# Altium PCB ECB02S2-Kit-V1.0.PcbDoc
Units mil, origin at the board's own origin, x right, y up, seen from the top; angles counter-clockwise.
Board outline 1299.21 x 1141.73 mil, 2 copper layers (Top Layer, Bottom Layer); 12 components, 15 nets, 76 pads, 62 vias.
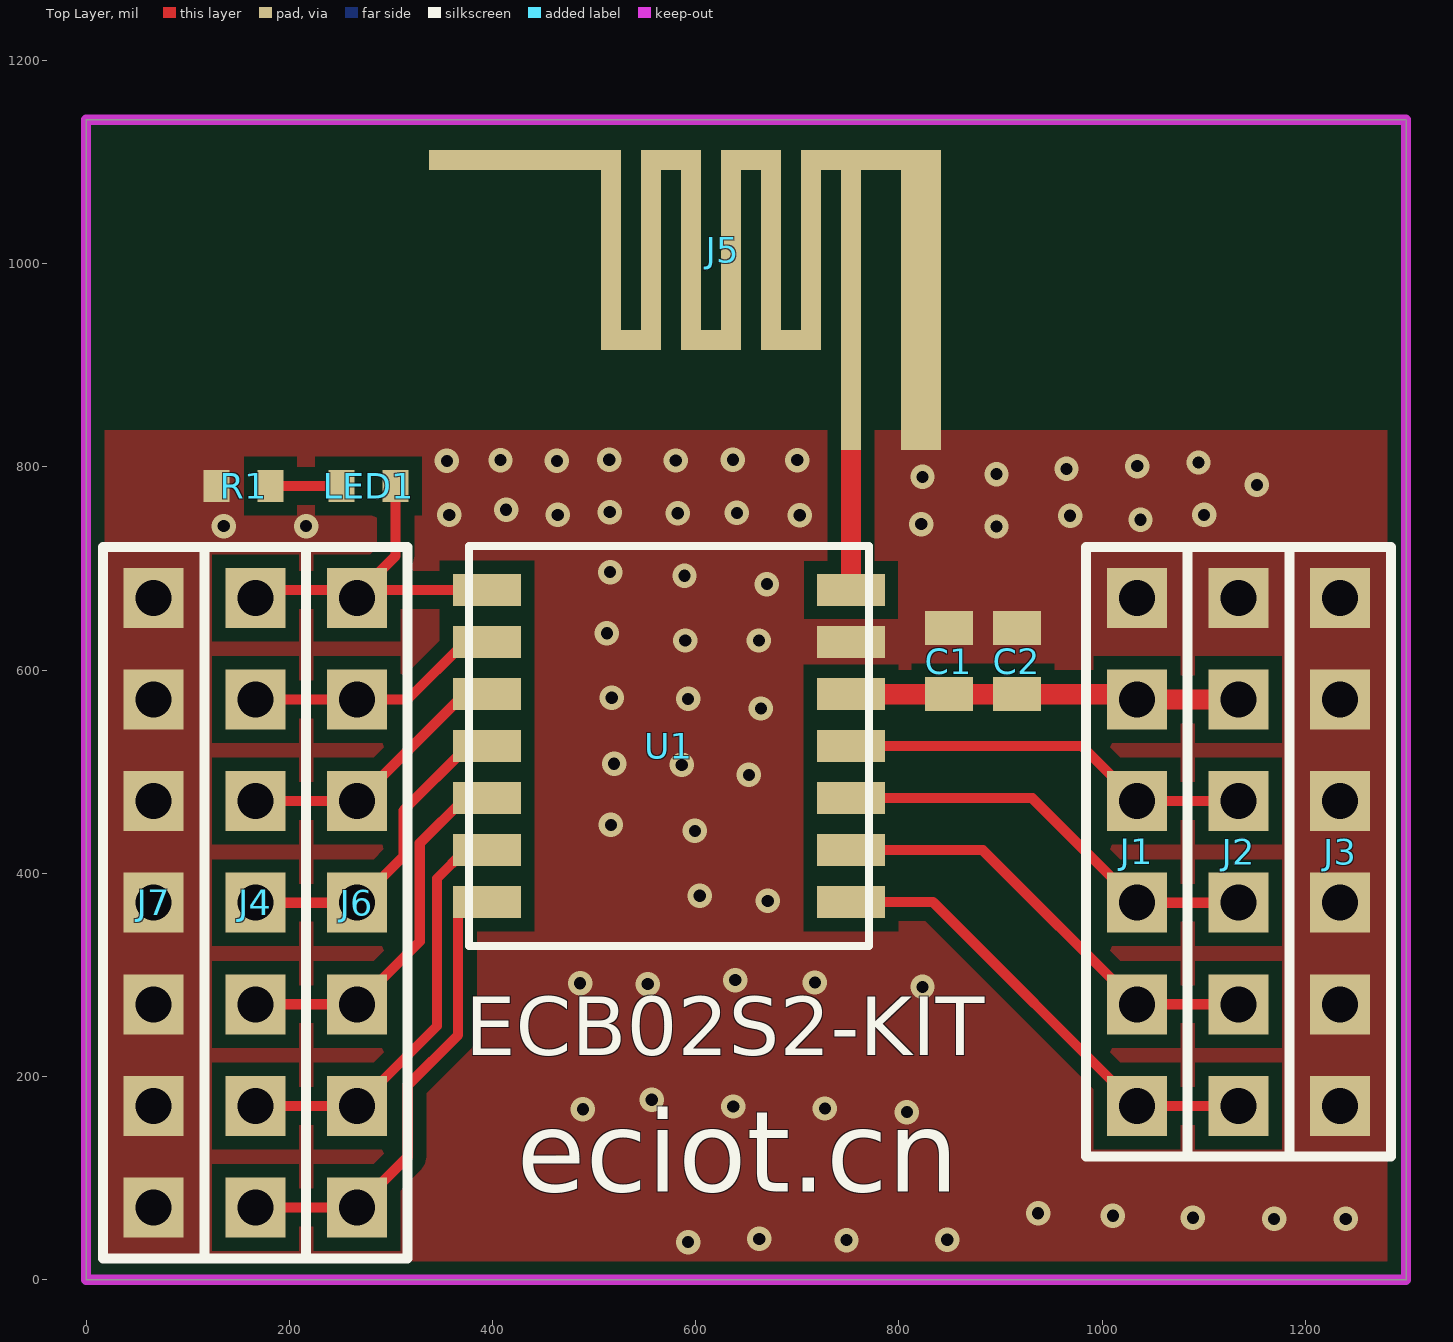
[diagram p0: Top Layer view]
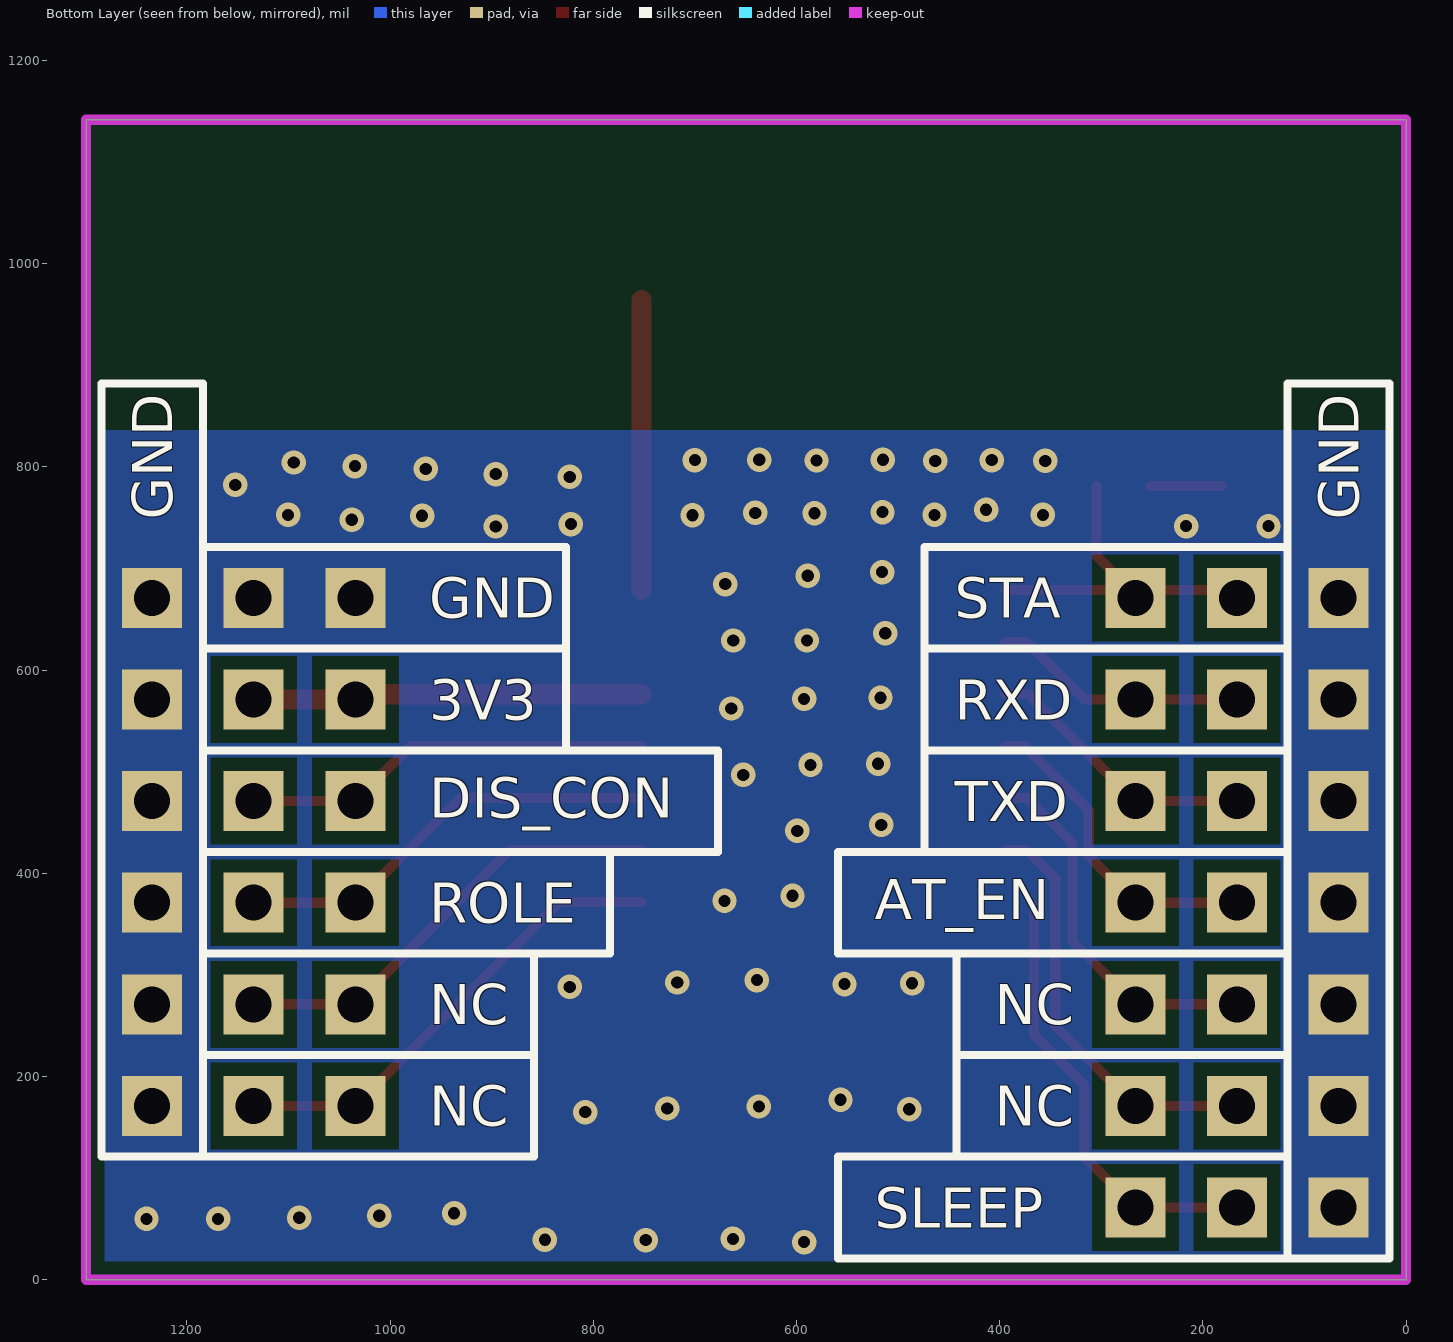
[diagram p1: Bottom Layer view, seen from below]

## Layer stack, top to bottom
Top Solder: solder mask 0.4, Solder Resist, Dk 3.5
Top Layer: signal copper 1.4
Dielectric 1: dielectric 12.6, FR-4, Dk 4.8
Bottom Layer: signal copper 1.4
Bottom Solder: solder mask 0.4, Solder Resist, Dk 3.5

## Board outline
0,0 0,1141.73 1299.21,1141.73 1299.21,0

## Design rules (kind name [scope] priority, off if disabled: settings)
Clearance [All] p1: gap=6 ignorepadtopadclearanceinfootprint=FALSE except(0: Arc-Hole Track-Hole SMDPad-Hole THPad-Hole Via-Hole Fill-Hole Poly-Hole Region-Hole Text-Hole)
PlaneConnect [All] p1: planeconnectstyle=Direct reliefexpansion=20 reliefentries=4 reliefconductorwidth=10 reliefairgap=10
PolygonConnect [All] p1: connectstyle=Direct reliefconductorwidth=10 reliefentries=4 polygonreliefangle="90 Angle" airgapwidth=10
RoutingVias [All] p1: holewidth=28 width=50 viastyle="Through Hole" minholewidth=28 minwidth=50 maxholewidth=28 maxwidth=50
SolderMaskExpansion [All] p1: expansion=4
Width [All] p1: maxlimit=100 minlimit=6 preferedwidth=10 minimp=50.000000 maximp=50.000000 favimp=50.000000
29 further rules are at their usual default settings.

## Components (designator, comment, footprint, x,y, rotation, side; value= is the part's Value field where it differs from the comment)
C1 "10uF" 0805 849.21,608.86 r270 top
C2 "100nF" 0805 916.14,608.86 r270 top
J1 "CON6" SIP06 1034.25,671.06 r270 top
J2 "CON6" SIP06 1134.25,671.06 r270 top
J3 "CON6" SIP06 1234.25,671.06 r270 top
J4 "CON7" SIP07 166.54,671.06 r270 top
J5 "ANT" ANT-2.4G-1 821.65,964.17 r180 top
J6 "CON7" SIP07 266.54,671.06 r270 top
J7 "CON7" SIP07 66.54,671.06 r270 top
LED1 "LED-BLUE" 0603-led 278.09,781.1 r180 top
R1 "2.2kΩ" 0603 154.98,781.1 r180 top
U1 "ECB02S2" ECB02S2 573.62,525.2 r0 top

## Footprints (in the part's own frame and the unit in brackets; to place one, negate y for a bottom-side part, rotate by r counter-clockwise, add the part's x,y. Pads: shape width x height; smd on the part's side, far side on the other; paste and mask are expansions set on the pad)
0603 [mm]
  rect 0.65x0.8 smd paste+0: 1(-0.675,0) 2(0.675,0)
0603-led [mm]
  rect 0.65x0.8 smd paste+0: 1(-0.675,0) 2(0.675,0)
0805 [mm]
  rect 0.85x1.2 smd paste+0: 1(-0.825,0) 2(0.825,0)
ANT-2.4G-1 [mm]
  rect 0.5x7.5 smd: 1(1.75,0)
  rect 1x7.5 smd: 2(0,0)
  rect 3.5x0.5 smd: 2(1.25,-3.5)
  rect 0.5x5 smd: 2(2.75,-1.25) 2(3.75,-1.25) 2(4.75,-1.25) 2(5.75,-1.25) 2(6.75,-1.25) 2(7.75,-1.25)
  rect 1.5x0.5 smd: 2(3.25,1) 2(4.25,-3.5) 2(5.25,1) 2(6.25,-3.5) 2(7.25,1)
  rect 4.8x0.5 smd: 2(9.9,-3.5)
ECB02S2 [mm]
  rect 1.7x0.8 smd: 1(-4.55,3.9) 2(-4.55,2.6) 3(-4.55,1.3) 4(-4.55,0) 5(-4.55,-1.3) 6(-4.55,-2.6) 7(-4.55,-3.9) 8(4.55,-3.9) 9(4.55,-2.6) 10(4.55,-1.3) 11(4.55,0) 12(4.55,1.3) 13(4.55,2.6) 14(4.55,3.9)
  silkscreen extent -5,-5 5,5
SIP06 [mm]
  rect 1.5x1.5 hole 0.9: 1(0,0) 2(2.54,0) 3(5.08,0) 4(7.62,0) 5(10.16,0) 6(12.7,0)
  silkscreen extent -1.27,-1.27 13.97,1.27
SIP07 [mm]
  rect 1.5x1.5 hole 0.9: 1(0,0) 2(2.54,0) 3(5.08,0) 4(7.62,0) 5(10.16,0) 6(12.7,0) 7(15.24,0)
  silkscreen extent -1.27,-1.27 16.51,1.27

## Part data
C1 C2: library part C, 封装=040, 类型=µ
LED1: library part LED-0402, 封装=040, 类型=LE
R1: library part R, 封装=040, 类型=µ

## Via types
v1: diameter 24, hole 12, Top Layer to Bottom Layer, tented both sides, 62 vias

## Nets (pads, with @x,y where several pads share a name; then routed paths per layer and width w, separated by ;. In a path a pad name is that pad's centre, name@x,y a point inside that pad or via, vN(x,y) a via of type N, cw(c..) or ccw(c..) an arc to the next point about the centre after c; other vN are vias at no path point)
+3.3V: C1.2 C2.2 J1.2 J2.2 U1.12 | length 383.7
  Top Layer w20: U1.12 C1.2 C2.2 1028.94,576.38 J1.2 J2.2
AT_EN: J4.4 J6.4 U1.4 | length 318.2
  Top Layer w10: J4.4 J6.4 312.35,416.87 312.35,461.95 375.59,525.2 U1.4
DIS_CON: J1.3 J2.3 U1.11 | length 403.9
  Top Layer w10: U1.11 980.12,525.2 J1.3 J2.3
GND: C1.1 C2.1 J1.1 J2.1 J3.1 J3.2 J3.3 J3.4 J3.5 J3.6 J5.2 J7.1 J7.2 J7.3 J7.4 J7.5 J7.6 J7.7 R1.2 U1.13
  other v1: 592.52,37.01 748.43,38.98 662.6,40.16 847.64,39.37 1169.29,59.84 1239.76,59.84 1089.37,61.02 1010.63,62.99 937.01,65.35 807.87,164.96 488.98,167.72 727.17,168.5 637.01,170.47 556.69,177.17 823.23,288.19 552.76,290.94 486.22,291.73 717.32,292.52 638.98,294.88 670.87,372.83 603.94,377.95 599.21,441.73 516.54,447.64 652.36,496.85 586.22,506.69 519.68,507.87 664.17,562.2 592.52,571.65 517.32,572.83 589.76,629.13 662.2,629.13 512.6,636.22 670.08,684.65 588.98,692.91 515.75,696.46 135.43,741.73 216.54,741.73 896.06,741.34 822.05,743.7 1037.8,748.03 968.5,751.97 357.48,752.76 464.17,752.76 702.36,752.36 1100.39,752.76 582.28,754.33 640.55,754.72 515.35,755.51 413.39,757.87 1152.36,782.28 823.23,790.16 896.06,792.91 964.96,798.03 1034.65,800.79 1094.88,804.33 355.12,805.91 463.39,805.91 580.31,806.3 407.87,806.69 514.96,807.09 636.61,807.09 700,806.69
NC1: J4.5 J6.5 U1.5 | length 368.6
  Top Layer w10: J4.5 J6.5 328.35,332.87 328.35,429.53 372.83,474.02 U1.5
NC2: J4.6 J6.6 U1.6 | length 417.2
  Top Layer w10: J4.6 J6.6 345.28,249.8 345.28,394.88 373.23,422.83 U1.6
NC3: J1.5 J2.5 U1.9 | length 444.4
  Top Layer w10: U1.9 882.48,422.83 J1.5 J2.5
NC4: J1.6 J2.6 U1.8 | length 464.6
  Top Layer w10: U1.8 833.66,371.65 J1.6 J2.6
NetJ5_1: J5.1 U1.14 | length 285.4
  Top Layer w19.68: U1.14 J5.1
NetLED1_2: LED1.2 R1.1 | length 70
  Top Layer w10: R1.1 LED1.2
ROLE: J1.4 J2.4 U1.10 | length 424.1
  Top Layer w10: U1.10 931.3,474.02 J1.4 J2.4
RXD: J4.2 J6.2 U1.2 | length 251.4
  Top Layer w10: J4.2 J6.2 316.34,571.06 372.83,627.56 U1.2
SLEEP: J4.7 J6.7 U1.7 | length 438.3
  Top Layer w10: J4.7 J6.7 316.54,121.06 316.54,191.34 366.14,240.94 U1.7@366.14,368.11
STA: J4.1 J6.1 LED1.1 U1.1 | length 357
  Top Layer w10: J4.1@174.21,678.74 J6.1@270.87,678.74 ; J6.1 266.54,674.41 J6.1@270.87,678.74 ; LED1.1 304.66,712.54 J6.1@270.87,678.74 ; U1.1 J6.1@270.87,678.74
  Top Layer w20: J4.1 J4.1@174.21,678.74
TXD: J4.3 J6.3 U1.3 | length 271.6
  Top Layer w10: J4.3 J6.3 266.73,471.06 372.05,576.38 U1.3

## Polygon pours and split planes (outlines as drawn)
GND on Top Layer (solid, remove dead copper, pour order 8): 0,0 1299.21,0 1299.21,836.22 0,836.22
GND on Bottom Layer (solid, remove dead copper, pour order 10): 0,0 1299.21,0 1299.21,836.22 0,836.22

## Keep-outs
Keep-Out Layer:
  the board outline again, w10

## Silkscreen, mask and mechanical layers (free items; w line width, h text height)
Top Overlay:
  text "ECB02S2-KIT" at 373.23,201.97 h98.43
  text "eciot.cn" at 423.61,60.24 h137.8
Bottom Overlay:
  lines w7.87: 116.54,121.06 559.06,121.06 559.06,21.06 116.54,21.06 ; 116.54,221.06 442.52,221.06 ; 116.54,321.06 559.06,321.06 559.06,421.06 116.54,421.06 ; 116.54,521.06 474.02,521.06 ; 116.54,621.06 474.02,621.06 ; 116.54,721.06 474.02,721.06 474.02,621.06 ; 442.52,121.06 442.52,221.06 ; 442.52,321.06 442.52,221.06 ; 474.02,421.06 474.02,521.06 ; 783.46,421.06 783.46,321.06 1184.25,321.06 ; 858.27,321.06 858.27,221.06 ; 1184.25,221.06 858.27,221.06 ; 1184.25,421.06 677.17,421.06 677.17,521.06 826.77,521.06 ; 1184.25,521.06 826.77,521.06 ; 1184.25,621.06 826.77,621.06 ; 1184.25,721.06 826.77,721.06 826.77,621.06 ; 116.54,21.06 116.54,881.89 16.54,881.89 16.54,21.06 116.54,21.06 ; 474.02,521.06 474.02,621.06 ; 826.77,521.06 826.77,621.06 ; 858.27,221.06 858.27,121.06 1184.25,121.06 ; 1184.25,121.06 1284.25,121.06 1284.25,881.89 1184.25,881.89 1184.25,121.06
  text "GND" at 46.86,748.03 h39.37 r270
  text "GND" at 1214.57,748.03 h39.37 r270
  text "STA" at 444.49,651.38 h39.37
  text "GND" at 961.42,651.38 h39.37
  text "RXD" at 444.49,551.38 h39.37
  text "3V3" at 961.42,551.38 h39.37
  text "DIS_CON" at 961.42,454.66 h39.37
  text "TXD" at 444.49,451.38 h39.37
  text "AT_EN" at 523.2,354.66 h39.37
  text "ROLE" at 961.42,351.38 h39.37
  text "NC" at 405.13,251.38 h39.37
  text "NC" at 961.42,251.38 h39.37
  text "NC" at 405.13,151.38 h39.37
  text "NC" at 961.42,151.38 h39.37
  text "SLEEP" at 523.2,51.38 h39.37
Mechanical 1:
  lines w10: 0,836.22 1299.21,836.22

## Text inside footprints (layer, text, board x,y; h text height)
LED1: Mechanical 1 "+" at 316.67,785.04 h7.87 r180